# EAGLE board TriggerTrap (EAGLE 6.5.0)
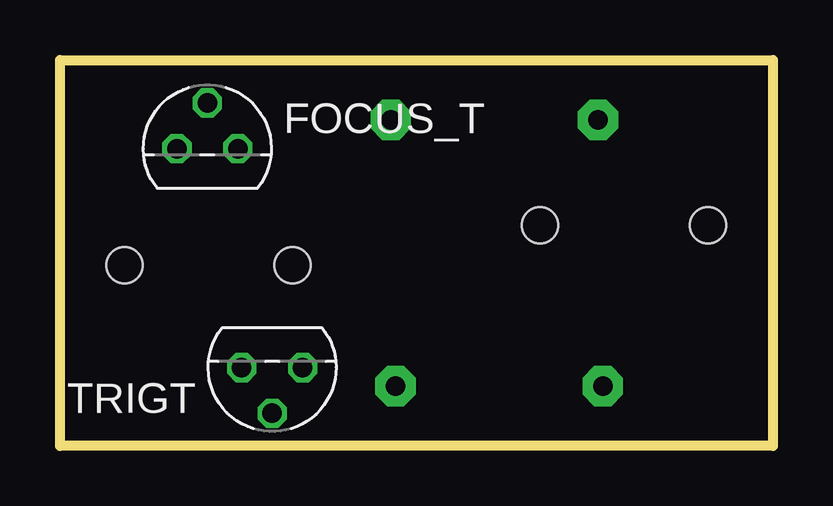
[diagram p0: board, top side]
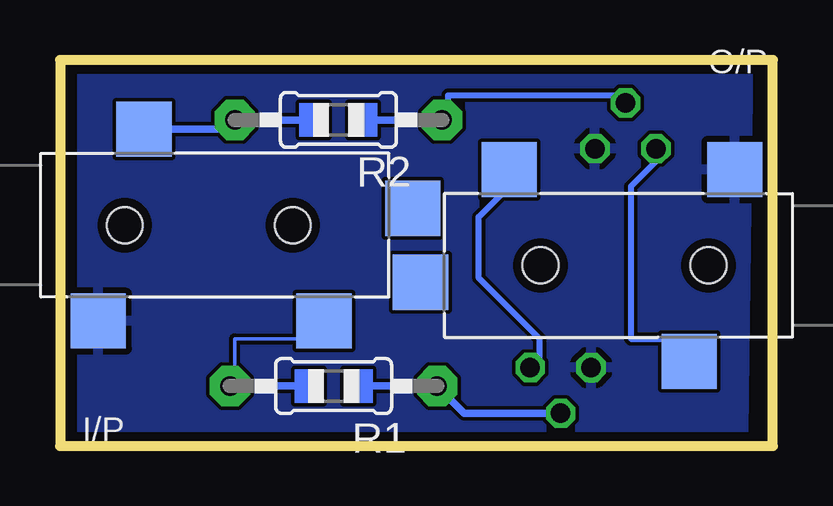
[diagram p1: board, bottom side, seen from below]

Size 29.7 x 16.1 mm. Coordinates in mm from the lower left corner, seen from the top.
Outline: 0,16.1 29.7,16.1 29.7,0 0,0 0,16.1
Copper layers (1*16): Top 0.0356mm / dielectric 1.5011mm / Bottom 0.0356mm
Design rules "LaenPCBOrder": minimum track width 6mil, minimum drill 13mil, track to track 6mil, track to pad 6mil, pad to pad 6mil, via to via 6mil, smd to smd 6mil, copper to edge 15mil, drill to drill 6mil, minimum pad ring 7mil, minimum via ring 7mil, stop-mask expansion 3mil, vias tented up to drill 0mil, thermal gap 10mil

## Footprints (pad centres in the part's own frame; a part is rotated, then mirrored left to right if it is on the bottom)
TO92 = drill 0.813 octagon: 1 1.27,0; 2 0,1.905; 3 -1.27,0
CON-3.5MM-STEREO-SMT = smd 2.3 x 2.3: 1 -1,-2.4; 2 -1,-11.8; 3 7,-4.3; 4 3.7,-15.5 | hole 1.5: 3,-3.5; 3,-10.5
0805-THM-7 = drill 0.813 pad 1.676 octagon: 1 -4.318,0; 2 4.318,0

## Placement (x,y rotation side)
FOCUS_T  [TO92]  6.14,12.4 0 top
I/P  CON-3.5MM-STEREO-SMT  [CON-3.5MM-STEREO-SMT]  30.5,6.21 90 bottom
O/P  CON-3.5MM-STEREO-SMT  [CON-3.5MM-STEREO-SMT]  -0.82,10.53 270 bottom
R1  [0805-THM-7]  18.3,2.5 180 bottom
R2  [0805-THM-7]  18.1,13.6 180 bottom
TRIGT  [TO92]  8.84,3.27 180 top

## Library data of the parts
FOCUS_T TRIGT = transistor
I/P O/P = con-3.5mm-stereo-smt
R1 R2 = adafruit

## Nets
GND: FOCUS_T.1 I/P.1 O/P.1 TRIGT.1
N$1: FOCUS_T.2 R2.1
N$2: R1.1 TRIGT.2
N$3: O/P.2 TRIGT.3
N$4: FOCUS_T.3 O/P.3
N$5: I/P.3 R2.2
N$6: I/P.2 R1.2

## Tracks (layer width: path | path; a pad name or v marks a point on that pad's centre or on a via)
GND
  pour Bottom: 1,16.2 28.8,16.2 28.8,0.4 1.2,0.6
N$1
  Bottom 0.254: FOCUS_T.2 5.91,14.63 13.53,14.63 13.53,13.36 R2.1
N$2
  Bottom 0.305: R1.1 12.85,1.37 TRIGT.2
N$3
  Bottom 0.254: O/P.2 10.99,10.82 12.26,9.55 12.26,7.01 9.72,4.47 9.72,3.2 TRIGT.3
N$4
  Bottom 0.254: O/P.3 3.37,4.47 5.91,4.47 5.91,10.82 4.64,12.09 FOCUS_T.3
N$5
  Bottom 0.305: R2.2 22.81,13.21 I/P.3
N$6
  Bottom 0.152: I/P.2 18.61,4.47 22.42,4.47 22.42,3.2 R1.2